# EAGLE board Buoy3 (EAGLE 8.6.3)
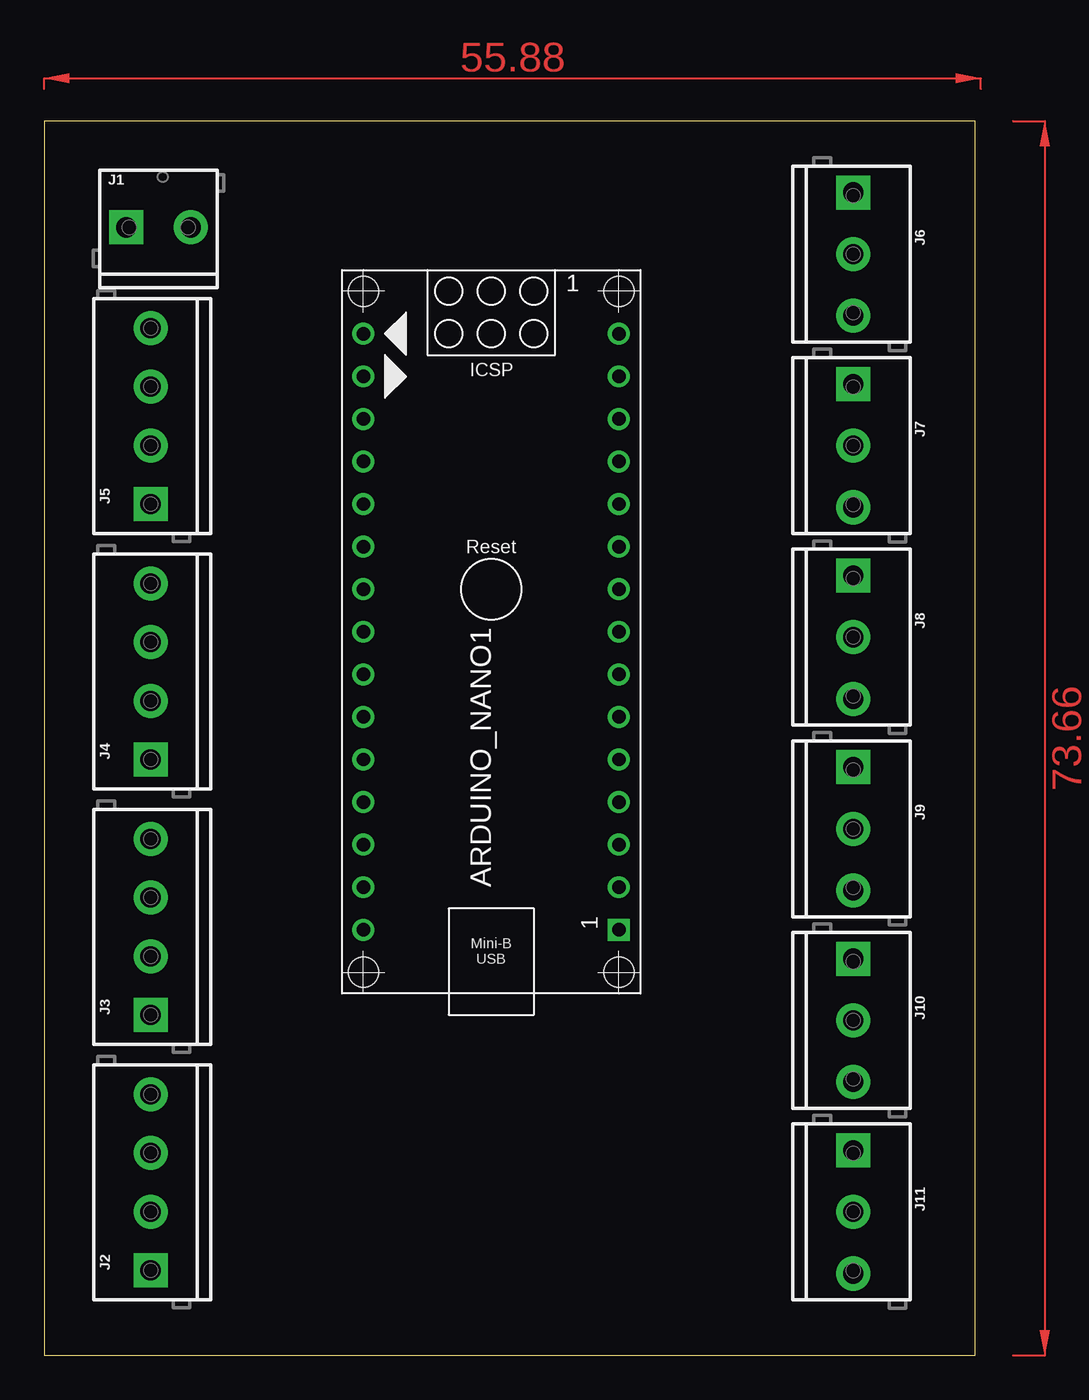
[diagram p0: board, top side]
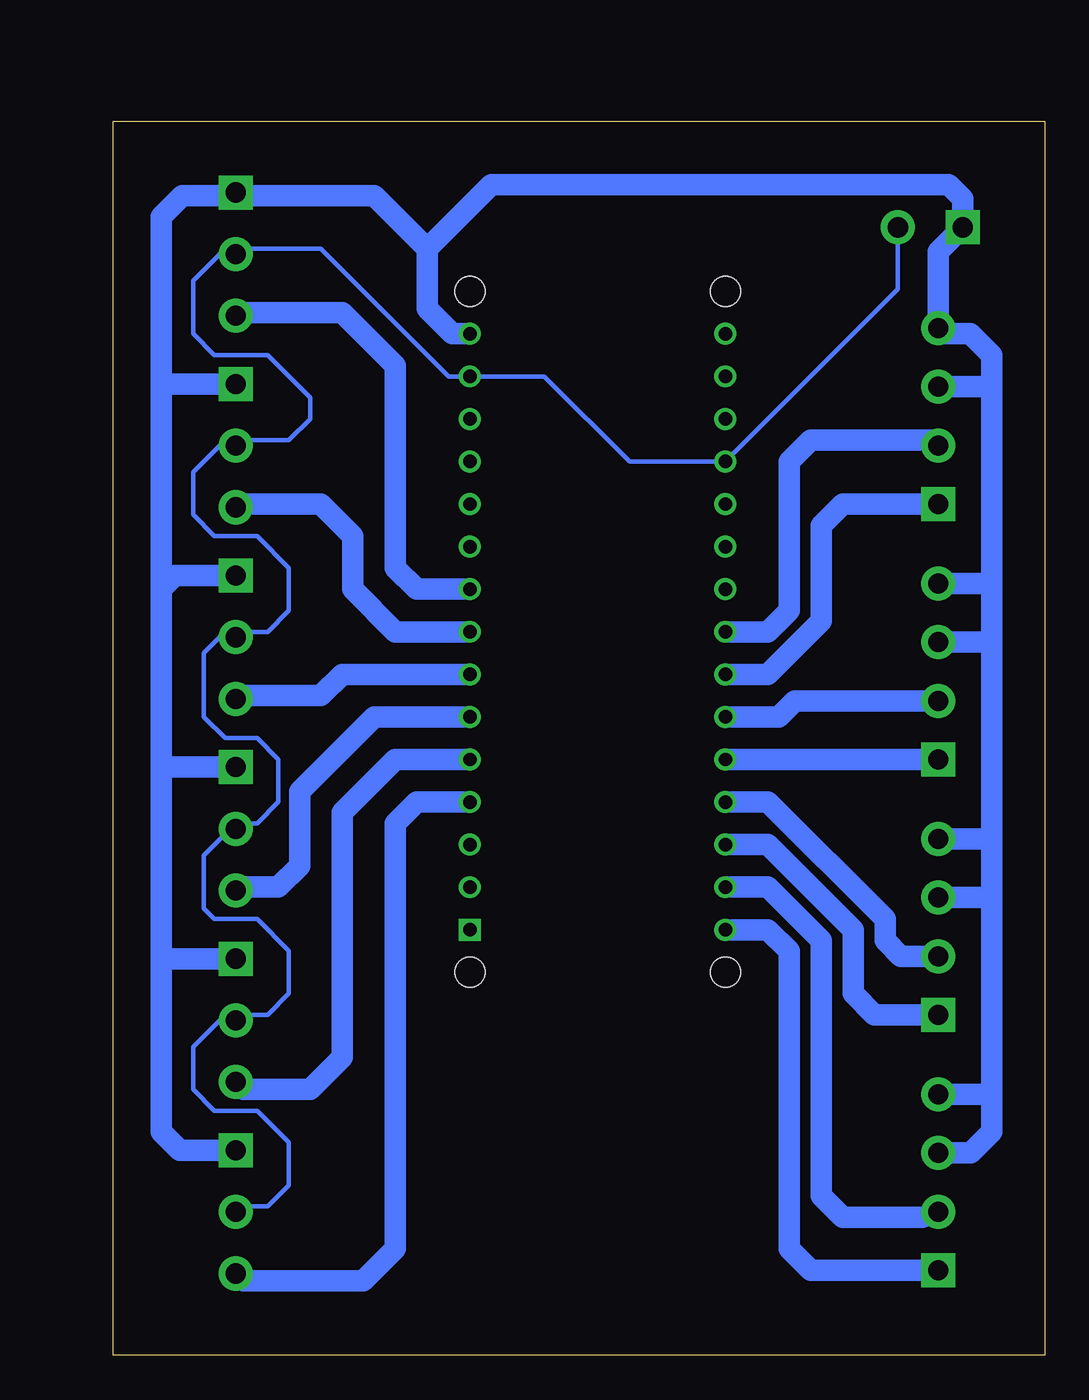
[diagram p1: board, bottom side, seen from below]

Size 55.55 x 73.65 mm. Coordinates in mm from the lower left corner, seen from the top.
Outline: 0,0 55.55,0 55.55,73.65 0,73.65 0,0
Copper layers (1*16): Top 0.035mm / dielectric 1.5mm / Bottom 0.035mm
Design rules "default": minimum track width 6mil, minimum drill 0.35mm, track to track 6mil, track to pad 6mil, pad to pad 6mil, via to via 6mil, smd to smd 6mil, copper to edge 40mil, drill to drill 6mil, minimum pad ring 10mil, minimum via ring 8mil, stop-mask expansion 4mil, vias tented up to drill 0mil, thermal gap 10mil

## Footprints (pad centres in the part's own frame; a part is rotated, then mirrored left to right if it is on the bottom)
ARDUINO_NANO = drill 0.8 square: 1 -20.32,-7.62 | drill 0.8: 2 -17.78,-7.62; 3 -15.24,-7.62; 4 -12.7,-7.62; 5 -10.16,-7.62; 6 -7.62,-7.62; 7 -5.08,-7.62; 8 -2.54,-7.62; 9 0,-7.62; 10 2.54,-7.62; 11 5.08,-7.62; 12 7.62,-7.62; 13 10.16,-7.62; 14 12.7,-7.62; 15 15.24,-7.62; 16 15.24,7.62; 17 12.7,7.62; 18 10.16,7.62; 19 7.62,7.62; 20 5.08,7.62; 21 2.54,7.62; 22 0,7.62; 23 -2.54,7.62; 24 -5.08,7.62; 25 -7.62,7.62; 26 -10.16,7.62; 27 -12.7,7.62; 28 -15.24,7.62; 29 -17.78,7.62; 30 -20.32,7.62 | hole 1.778: -22.86,-7.62; -22.86,7.62; 17.78,7.62; 17.78,-7.62
SCREWTERMINAL-3.5MM-2_LOCK = drill 1.2 pad 2.032 square: 1 -0.178,0 | drill 1.2 pad 2.032: 2 3.678,0
SCREWTERMINAL-3.5MM-4 = drill 1.2 pad 2.032 square: 1 0,0 | drill 1.2 pad 2.032: 2 3.5,0; 3 7,0; 4 10.5,0
SCREWTERMINAL-3.5MM-3_LOCK.007S = drill 1.2 pad 2.032 square: 1 -0.178,0 | drill 1.2 pad 2.032: 2 3.5,0; 3 7.178,0

## Placement (x,y rotation side)
ARDUINO_NANO1  [ARDUINO_NANO]  26.67,45.72 90 top
J1  [SCREWTERMINAL-3.5MM-2_LOCK]  5.08,67.31 0 top
J2  [SCREWTERMINAL-3.5MM-4]  6.35,5.08 90 top
J3  [SCREWTERMINAL-3.5MM-4]  6.35,20.32 90 top
J4  [SCREWTERMINAL-3.5MM-4]  6.35,35.56 90 top
J5  [SCREWTERMINAL-3.5MM-4]  6.35,50.8 90 top
J6  [SCREWTERMINAL-3.5MM-3_LOCK.007S]  48.26,69.21 270 top
J7  [SCREWTERMINAL-3.5MM-3_LOCK.007S]  48.26,57.79 270 top
J8  [SCREWTERMINAL-3.5MM-3_LOCK.007S]  48.26,46.36 270 top
J9  [SCREWTERMINAL-3.5MM-3_LOCK.007S]  48.26,34.93 270 top
J10  [SCREWTERMINAL-3.5MM-3_LOCK.007S]  48.26,23.5 270 top
J11  [SCREWTERMINAL-3.5MM-3_LOCK.007S]  48.26,12.07 270 top

## Library data of the parts
ARDUINO_NANO1 = ArduinoNanoV30
J1 = SparkFun-Connectors; PROD_ID: CONN-08399
J2-J5 = SparkFun-Connectors; PROD_ID: 2xCONN-08399; SF_ID: 2xPRT-08084
J6-J11 = SparkFun-Connectors; PROD_ID: CONN-08288; SF_ID: PRT-08235

## Nets
5V: ARDUINO_NANO1.12
5VDC: ARDUINO_NANO1.15 J1.1 J2.3 J2.4 J3.3 J3.4 J4.3 J4.4 J5.3 J5.4 J6.1 J7.1 J8.1 J9.1 J10.1 J11.1
GND: ARDUINO_NANO1.14 ARDUINO_NANO1.19 J1.2 J6.2 J7.2 J8.2 J9.2 J10.2 J11.2
N$3: ARDUINO_NANO1.30 J2.1
N$4: ARDUINO_NANO1.29 J2.2
N$5: ARDUINO_NANO1.28 J3.1
N$6: ARDUINO_NANO1.27 J3.2
N$7: ARDUINO_NANO1.26 J4.1
N$8: ARDUINO_NANO1.25 J4.2
N$9: ARDUINO_NANO1.24 J5.1
N$10: ARDUINO_NANO1.23 J5.2
N$11: ARDUINO_NANO1.7 J8.3
N$12: ARDUINO_NANO1.4 J11.3
N$13: ARDUINO_NANO1.5 J10.3
N$14: ARDUINO_NANO1.6 J9.3
N$15: ARDUINO_NANO1.8 J7.3
N$16: ARDUINO_NANO1.9 J6.3

## Tracks (layer width: path | path; a pad name or v marks a point on that pad's centre or on a via)
5VDC
  Bottom 1.27: J2.3 4.43,12.08 3.18,13.34 3.18,15.24 | 3.18,45.72 3.18,57.79 | 3.18,42.55 3.18,45.72 | 3.18,30.48 3.18,42.55 | 3.18,27.3 3.18,30.48 | 3.18,15.24 3.18,27.3 | 3.18,57.79 3.18,59.69 4.45,60.96 6.01,60.96 J5.4 6.35,65.86 J1.1 4.9,69.04 5.71,69.85 33.02,69.85 36.83,66.04 | J5.3 3.19,57.8 3.18,57.79 | J4.4 3.52,46.06 3.18,45.72 | J4.3 3.19,42.56 3.18,42.55 | J3.4 3.52,30.82 3.18,30.48 | J3.3 3.19,27.32 3.18,27.3 | J2.4 3.52,15.58 3.18,15.24 | J11.1 51.61,12.24 52.71,13.34 52.71,23.5 | 52.71,45.72 52.71,57.79 | 52.71,34.93 52.71,45.72 | 52.71,23.5 52.71,34.93 | 52.71,57.79 52.71,67.94 51.44,69.21 48.44,69.21 | 48.44,69.21 J6.1 | J7.1 52.53,57.96 52.71,57.79 | J8.1 51.89,46.53 52.71,45.72 | J9.1 52.53,35.1 52.71,34.93 | J10.1 52.53,23.67 52.71,23.5 | ARDUINO_NANO1.15 35.34,60.96 36.83,62.45 36.83,66.04 | 36.83,66.04 40.01,69.21 48.44,69.21
GND
  Bottom 0.254: J11.2 47.94,8.89 46.35,8.89 45.09,10.16 45.09,12.7 46.99,14.61 49.53,14.61 50.8,15.88 50.8,18.41 49.22,20 J10.2 47.94,20.32 46.35,20.32 45.09,21.59 45.09,24.13 46.99,26.04 49.53,26.04 50.16,26.67 50.16,29.84 48.59,31.43 J9.2 47.94,31.75 46.99,31.75 45.72,33.02 45.72,35.56 46.99,36.83 48.9,36.83 50.16,38.1 50.16,41.91 49.22,42.86 J8.2 47.94,43.18 46.35,43.18 45.09,44.45 45.09,46.99 46.99,48.9 49.53,48.9 50.8,50.16 50.8,52.7 49.22,54.29 J7.2 47.94,54.61 45.09,54.61 43.81,55.88 43.81,57.15 46.35,59.69 49.53,59.69 50.8,60.96 50.8,64.13 49.22,65.71 J6.2 47.94,66.04 43.18,66.04 35.56,58.42 ARDUINO_NANO1.14 29.84,58.42 24.77,53.34 ARDUINO_NANO1.19 8.76,63.63 J1.2
N$3
  Bottom 1.27: ARDUINO_NANO1.30 16.51,25.4 15.24,24.13 15.24,6.35 13.97,5.08 J2.1
N$4
  Bottom 1.27: ARDUINO_NANO1.29 16.51,27.94 13.34,24.77 13.34,9.52 12.07,8.25 7.31,8.25 J2.2
N$5
  Bottom 1.27: ARDUINO_NANO1.28 16.51,30.48 11.43,25.4 11.43,21.59 10.16,20.32 J3.1
N$6
  Bottom 1.27: J3.2 8.58,23.82 9.52,24.77 9.52,26.04 16.51,33.02 ARDUINO_NANO1.27
N$7
  Bottom 1.27: J4.1 ARDUINO_NANO1.26
N$8
  Bottom 1.27: J4.2 14.91,39.06 15.88,38.1 ARDUINO_NANO1.25
N$9
  Bottom 1.27: J5.1 12.07,50.8 13.34,49.53 13.34,43.81 16.51,40.64 ARDUINO_NANO1.24
N$10
  Bottom 1.27: ARDUINO_NANO1.23 16.51,43.18 15.24,44.45 15.24,53.34 13.97,54.61 6.35,54.61 J5.2
N$11
  Bottom 1.27: ARDUINO_NANO1.7 41.91,40.64 43.18,39.37 48.07,39.37 J8.3
N$12
  Bottom 1.27: ARDUINO_NANO1.4 37.47,33.02 38.73,31.75 38.73,6.35 40.64,4.45 47.82,4.45 J11.3
N$13
  Bottom 1.27: ARDUINO_NANO1.5 38.73,35.56 41.91,32.38 41.91,17.78 43.81,15.88 47.82,15.88 J10.3
N$14
  Bottom 1.27: ARDUINO_NANO1.6 40.01,38.1 44.45,33.66 44.45,29.21 45.72,27.94 48.07,27.94 J9.3
N$15
  Bottom 1.27: ARDUINO_NANO1.8 38.73,43.18 41.27,45.72 41.27,48.9 43.18,50.8 48.07,50.8 J7.3
N$16
  Bottom 1.27: ARDUINO_NANO1.9 37.47,45.72 38.73,46.99 38.73,59.05 41.91,62.23 48.07,62.23 J6.3
(copper drawn outside any net)
  shapes: Top area x2